# Altium PCB RemoteUnitBoard.PcbDoc
Units mm, origin at the board's own origin, x right, y up, seen from the top; angles counter-clockwise.
Board outline 60 x 32 mm, 4 copper layers (Top Copper, Signal Layer 1, Signal Layer 2, Bottom Copper), stack 1.57 mm thick; 58 components, 48 nets, 234 pads, 59 vias.
Unrouted connection lines stored in the file: 10.
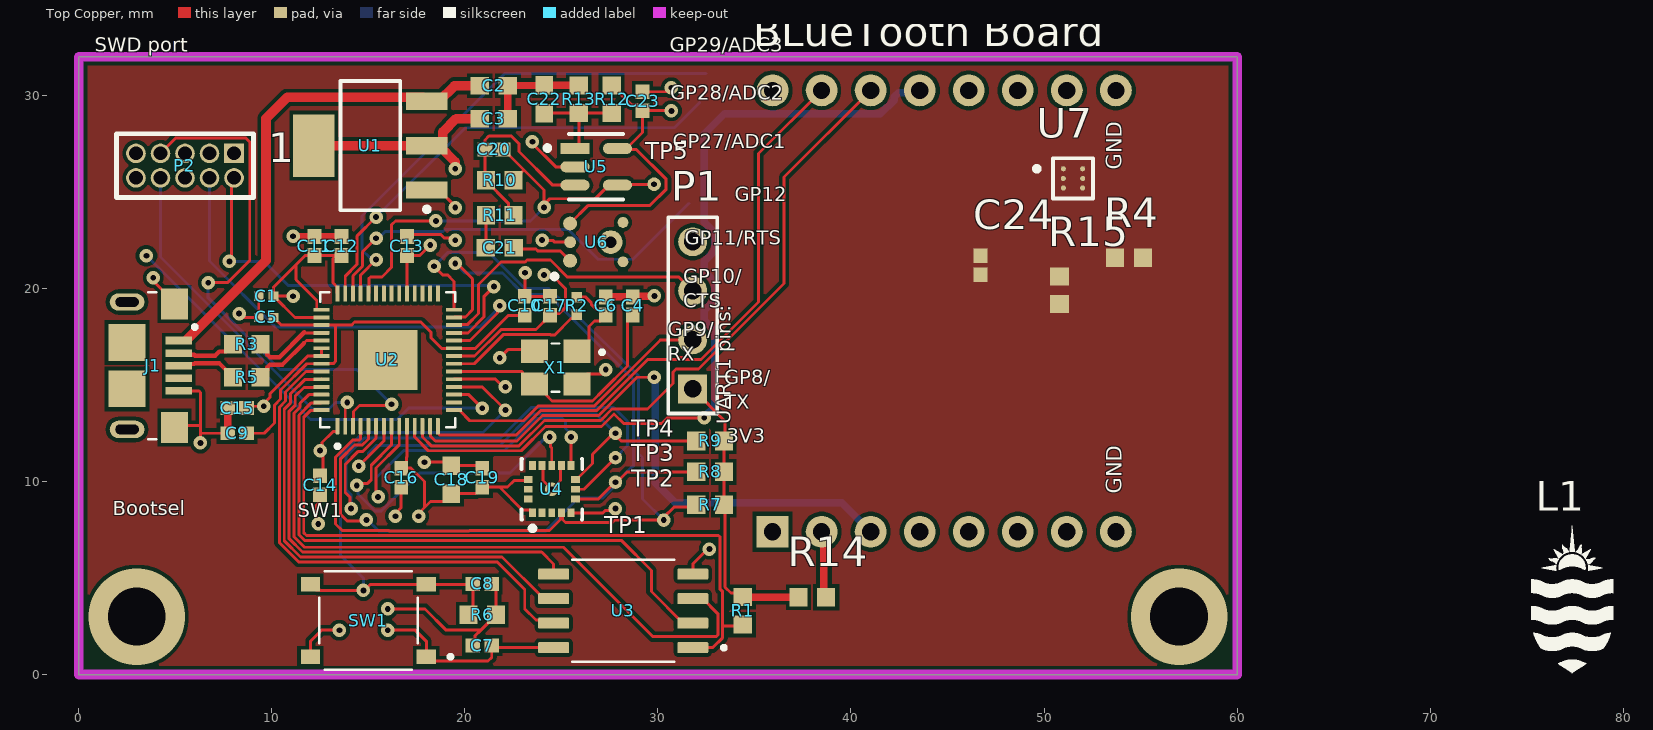
[diagram p0: Top Copper view]
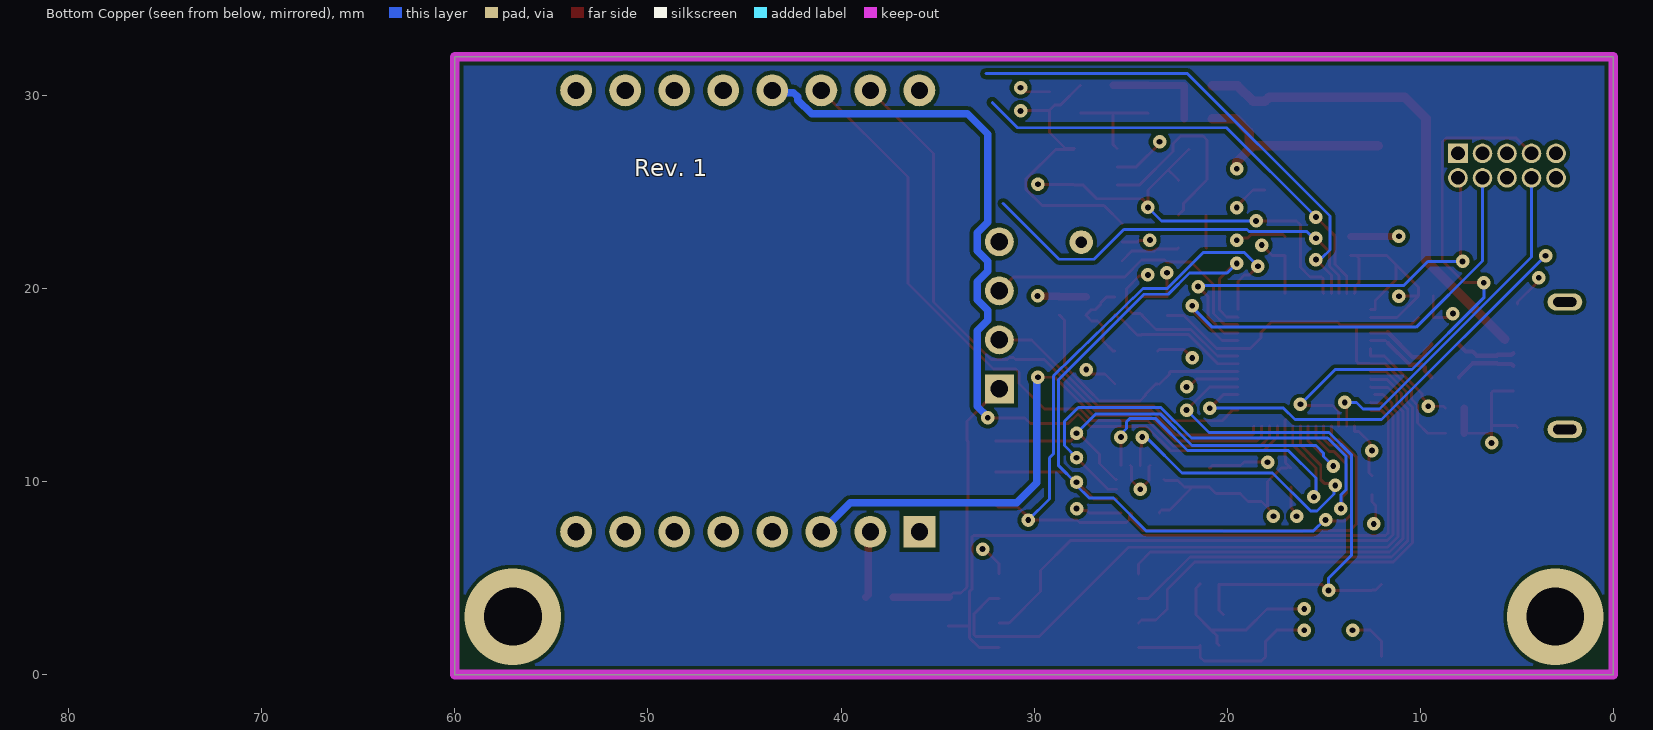
[diagram p1: Bottom Copper view, seen from below]
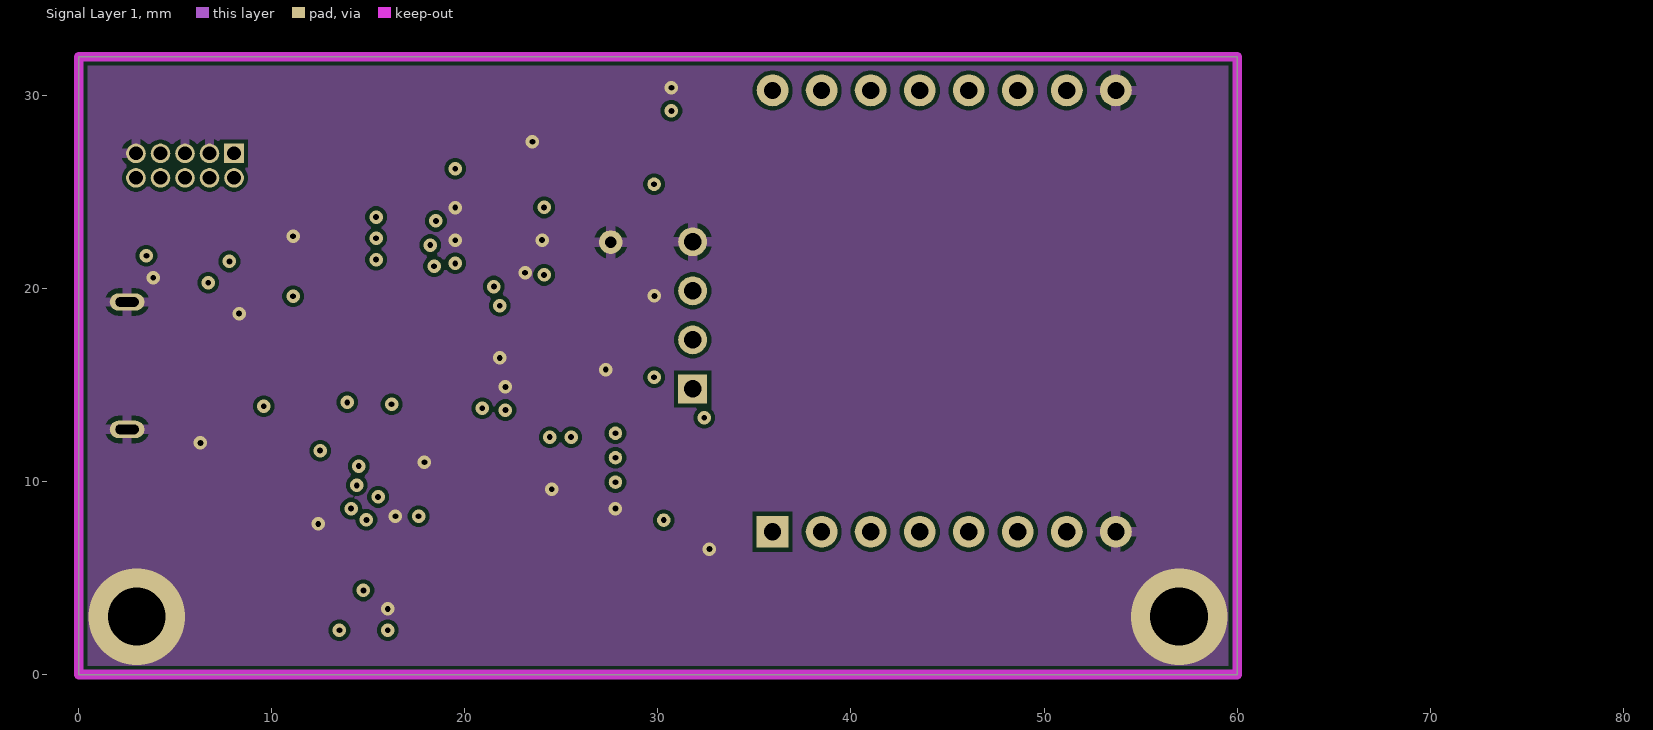
[diagram p2: Signal Layer 1]
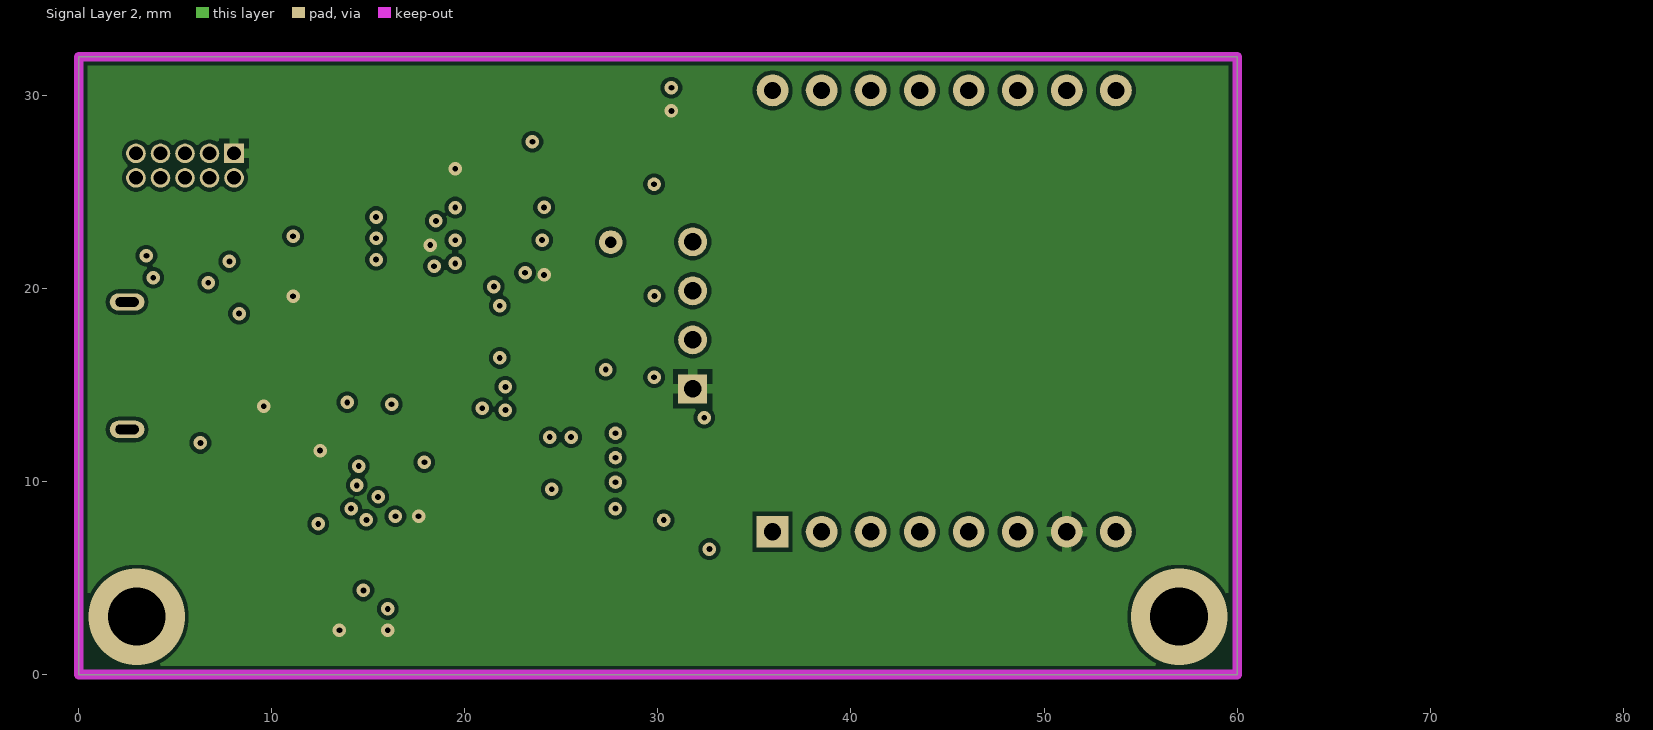
[diagram p3: Signal Layer 2]

## Layer stack, top to bottom
Top Mask: solder mask 0.015, Solder Resist, Dk 3.8
Top Copper: signal copper 0.035
Dielectric 1: prepreg 0.2, 7628, Dk 4.6
Signal Layer 1: signal copper 0.0175
Core: core 1.065, FR-4, Dk 4.5
Signal Layer 2: signal copper 0.0175
Dielectric 2: prepreg 0.2, 7628, Dk 4.6
Bottom Copper: signal copper 0.035
Bottom Mask: solder mask 0.015, Solder Resist, Dk 3.8

## Board outline
0,0 60,0 60,32 0,32

## Design rules (kind name [scope] priority, off if disabled: settings)
BoardOutlineClearance [All] p1: gap=0.2 ignorepadtopadclearanceinfootprint=FALSE except(0.4: Arc-SplitBarrior Arc-SplitContinuation Track-SplitBarrior Track-SplitContinuation SMDPad-SplitBarrior SMDPad-SplitContinuation THPad-SplitBarrior THPad-SplitContinuation Via-SplitBarrior Via-SplitContinuation Fill-SplitBarrior Fill-SplitContinuation Poly-SplitBarrior Poly-SplitContinuation Region-SplitBarrior Region-SplitContinuation Text-SplitBarrior Text-SplitContinuation)
Clearance "Clearance Bottom Layer" [OnLayer('Bottom Layer')] p1: gap=0.203 ignorepadtopadclearanceinfootprint=TRUE except(0.254: Arc-Text Track-Text SMDPad-Text THPad-Text Via-Text Fill-Text Poly-Text Region-Text Text-Text)
Clearance "Clearance Top Layer" [OnLayer('Top Layer')] p2: gap=0.203 ignorepadtopadclearanceinfootprint=TRUE except(0.254: Arc-Text Track-Text SMDPad-Text THPad-Text Via-Text Fill-Text Poly-Text Region-Text Text-Text)
Clearance [All] p3: gap=0.2 ignorepadtopadclearanceinfootprint=FALSE except(0.1: Arc-Arc Arc-Track Track-Track SMDPad-SMDPad; 0.127: Arc-Via Track-Via SMDPad-Via THPad-Via Via-Via; 0.254: Arc-Text Track-Text SMDPad-Text THPad-Text Via-Text Fill-Text Poly-Text Region-Text Text-Text)
DiffPairsRouting [All] p1: maxlimit=0.254 minlimit=0.127 mostfreqgap=0.152 toplayer_minwidth=0.152 toplayer_maxwidth=0.5 toplayer_prefwidth=0.229 midlayer1_minwidth=0.152 midlayer1_maxwidth=0.5 midlayer1_prefwidth=0.229 midlayer2_minwidth=0.152 midlayer2_maxwidth=0.5 midlayer2_prefwidth=0.229 bottomlayer_minwidth=0.152 bottomlayer_maxwidth=0.5 bottomlayer_prefwidth=0.229 maxuncoupledlength=12.7
HoleSize [All] p1: absolutevalues=TRUE maxlimit=6.3 minlimit=0.2 maxpercent=80.000 minpercent=20.000
MinimumAnnularRing [All] p1: minimumring=0.076
MinimumSolderMaskSliver [All] p1: minsoldermaskwidth=0.1
PolygonConnect PolygonConnect_1 [All] p1: thpad.connectstyle=Relief thpad.reliefconductorwidth=0.508 thpad.reliefentries=4 thpad.polygonreliefangle="90 Angle" thpad.airgapwidth=0.254 smdpad.connectstyle=Relief smdpad.reliefconductorwidth=0.508 smdpad.reliefentries=4 smdpad.polygonreliefangle="90 Angle" smdpad.airgapwidth=0.254 via.connectstyle=Direct via.reliefconductorwidth=0.508 via.reliefentries=4 via.polygonreliefangle="90 Angle" via.airgapwidth=0.254
RoutingCorners [All] p1: cornerstyle=Round minsetback=2.54 maxsetback=2.54
RoutingVias [All] p1: holewidth=0.5 width=1 viastyle="Through Hole" minholewidth=0.2 minwidth=0.45 maxholewidth=1 maxwidth=2
SilkToSilkClearance [All] p1: silktosilkclearance=0.1
SilkToSolderMaskClearance [IsPad] p1: minsilkscreentomaskgap=0.1 clearancetoexposedcopper=TRUE
SolderMaskExpansion [All] p1: expansion=0.102 istentingtop=FALSE
SupplyNets "Schematic Supply Nets" [InNet('VCC')] p1: voltage=0.000
SupplyNets "Schematic Supply Nets_4" [InNet('5V')] p2: voltage=0.000
SupplyNets "Schematic Supply Nets_3" [InNet('GND')] p3: voltage=0.000
SupplyNets "Schematic Supply Nets_2" [InNet('3V3')] p4: voltage=0.000
SupplyNets "Schematic Supply Nets_1" [InNet('1V1')] p5: voltage=0.000
Width [All] p1: maxlimit=2.54 minlimit=0.089 preferedwidth=0.381
24 further rules are at their usual default settings.

## Classes and differential pairs
component class RemoteSensors: C18 C19 C20 C21 C22 C23 C24 R4 R7 R8 R9 R10 R11 R12 R13 R15 U4 U5 U6 U7
component class RemoteMain: "BLueTooth Board" C1 C2 C3 C4 C5 C6 C7 C8 C9 C10 C11 C12 C13 C14 C15 C16 C17 J1 L1 P1 P2 R1 R2 R3 R5 R6 R14 SW1 TP1 TP2 TP3 TP4 TP5 U1 U2 U3 X1
differential pair USB_DX: +USB_DX_P -USB_DX_N
differential pair USB_D: +USB_D_P -USB_D_N

## Components (designator, comment, footprint, x,y, rotation, side; value= is the part's Value field where it differs from the comment)
"BLueTooth Board" "RN4871 CLICK" "mikroBUS - Large" 57.53,6.13 r90 top
C1 "CL05A105KA5NQNC" FP-CL542-IPC_C 9.7,19.6 r0 top
C2 "CL10A106KP8NNNC" FP-CL10-IPC_B 21.5,30.5 r0 top
C3 "CL10A106KP8NNNC" FP-CL10-IPC_B 21.5,28.8 r0 top
C4 "0402CG330J500NT" FP-0402-L_1_0_1-W_0_5_0_1-IPC_A 28.7,19.1 r270 top
C5 "CL05A105KA5NQNC" FP-CL542-IPC_C 9.7,18.5 r180 top
C6 "0402CG330J500NT" FP-0402-L_1_0_1-W_0_5_0_1-IPC_A 27.3,19.1 r270 top
C7 "CL05B104KO5NNNC" CAPC1050X55X23ML05T13 20.9,1.5 r0 top
C8 "CL05B104KO5NNNC" CAPC1050X55X23ML05T13 20.9,4.7 r180 top
C9 "CL05B104KO5NNNC" CAPC1050X55X23ML05T13 8.2,12.5 r0 top
C10 "CL05B104KO5NNNC" CAPC1050X55X23ML05T13 23.1,19.1 r270 top
C11 "CL05B104KO5NNNC" CAPC1050X55X23ML05T13 12.2,22.2 r270 top
C12 "CL05B104KO5NNNC" CAPC1050X55X23ML05T13 13.6,22.2 r270 top
C13 "CL05B104KO5NNNC" CAPC1050X55X23ML05T13 17,22.2 r270 top
C14 "CL05B104KO5NNNC" CAPC1050X55X23ML05T13 12.5,9.81 r90 top
C15 "CL05B104KO5NNNC" CAPC1050X55X23ML05T13 8.2,13.8 r0 top
C16 "CL05B104KO5NNNC" CAPC1050X55X23ML05T13 16.7,10.2 r90 top
C17 "CL05B104KO5NNNC" CAPC1050X55X23ML05T13 24.4,19.1 r270 top
C18 "CL10A106KP8NNNC" FP-CL10-IPC_B 19.3,10.1 r90 top
C19 "CL05B104KO5NNNC" CAPC1050X55X23ML05T13 20.9,10.2 r270 top
C20 "0402CG330J500NT" FP-0402-L_1_0_1-W_0_5_0_1-IPC_A 21.5,27.2 r0 top
C21 "CL10A106KP8NNNC" FP-CL10-IPC_B 21.8,22.1 r180 top
C22 "CL10A225KO8NNNC" FP-CL10-IPC_B 24.1,29.8 r90 top
C23 "CL05B104KO5NNNC" CAPC1050X55X23ML05T13 29.2,29.7 r270 top
C24 "CL05B104KO5NNNC" CAPC1050X55X23ML05T13 46.7,21.2 r90 top
J1 "10118193-0001LF" FCI_10118193-0001LF 2.5,16 r90 top
L1 "JCU-LOGO" "JCU Logo Without Text" 77.4,3.8 r0 top
P1 "Header 4" HDR1X4 31.8,14.8 r90 top
P2 "Header 1.27mm 2x5 PTH" "Header 1.27mm 2x5 PTH" 8.04,27 r180 top
R1 "0603WAF1002T5E" FP-CRCW0603-e3-IPC_B 34.4,3.3 r90 top
R2 "0402WGF1001TCE" RESC1005X40X25NL05T05 25.8,19.1 r270 top
R3 "0603WAF270JT5E" FP-CRCW0603-e3-IPC_B 8.7,17.1 r180 top
R4 "0603WAF4701T5E" FP-CRCW0603-e3-IPC_B 54.4,21.6 r0 top
R5 "0603WAF270JT5E" FP-CRCW0603-e3-IPC_B 8.7,15.4 r180 top
R6 "0603WAF1003T5E" FP-CRCW0603-e3-IPC_B 20.9,3.1 r0 top
R7 "0603WAF4701T5E" FP-CRCW0603-e3-IPC_B 32.7,8.8 r0 top
R8 "0603WAF4701T5E" FP-CRCW0603-e3-IPC_B 32.7,10.5 r0 top
R9 "0603WAF4701T5E" FP-CRCW0603-e3-IPC_B 32.7,12.1 r0 top
R10 "0603WAF2203T5E" FP-CRCW0603-e3-IPC_B 21.8,25.6 r0 top
R11 "0603WAF3301T5E" FP-CRCW0603-e3-IPC_B 21.8,23.8 r0 top
R12 "0603WAF1003T5E" FP-CRCW0603-e3-IPC_B 27.6,29.8 r90 top
R13 "0603WAF1003T5E" FP-CRCW0603-e3-IPC_B 25.9,29.8 r270 top
R14 "0603WAF1002T5E" FP-CRCW0603-e3-IPC_B 38,4 r180 top
R15 "0603WAF4701T5E" FP-CRCW0603-e3-IPC_B 50.8,19.9 r90 top
SW1 "TS-1187A-B-A-B" SW_TS-1187A-B-A-B 15,2.8 r180 top
TP1 "Test point" "Test point-Footprint-1" 30.3,8 r90 top
TP2 "Test point" "Test point-Footprint-1" 27.8,9.967 r90 top
TP3 "Test point" "Test point-Footprint-1" 27.8,11.233 r90 top
TP4 "Test point" "Test point-Footprint-1" 27.8,12.5 r90 top
TP5 "Test point" "Test point-Footprint-1" 29.8,25.4 r90 top
U1 "AMS1117-3.3" SOT230P700X180-4N 15.1,27.4 r0 top
U2 "RP2040" QFN40P700X700X90-57N 16,16.3 r0 top
U3 "W25Q128JVSIQ" SOIC127P790X216-8N 28.2,3.3 r90 top
U4 "LIS3DHTR" FP-LGA-16-7983231-MFG 24.5,9.6 r90 top
U5 "LMV321IDBVR" FP-DBV0005A-IPC_B 26.8,26.3 r180 top
U6 "Goertek S08OB381-026" Goertek_S08OB381-026 26.8,22.4 r90 top
U7 "HDC2010YPAR" FP-YPA0006-MFG 51.5,25.7 r0 top
X1 "X322512MSB4SI" X322512MSB4SI-Footprint-1 24.7,15.9 r180 top

## Footprints (in the part's own frame and the unit in brackets; to place one, negate y for a bottom-side part, rotate by r counter-clockwise, add the part's x,y. Pads: shape width x height; smd on the part's side, far side on the other; paste and mask are expansions set on the pad)
CAPC1050X55X23ML05T13 [mm] "Chip Capacitor, 2-Leads, Body 1.05x0.55mm, IPC Low Density"
  rect 0.76x0.72 smd: 1(-0.49,0) 2(0.49,0)
  body extent -0.53,-0.28 0.53,0.27, height 0.55
FCI_10118193-0001LF [mm]
  rect 0.4x1.35 smd: 1(1.3,-2.675) 2(0.65,-2.675) 3(0,-2.675) 4(-0.65,-2.675) 5(-1.3,-2.675)
  rect 1.6x1.4 smd: S1(3.2,-2.45) S2(-3.2,-2.45)
  rect 1.9x1.9 smd: S3(-1.2,0) S4(1.2,0)
  oval 0.9x1.8 hole 0.5 slot 1.2 at 90 deg: S5(3.3,0) S6(-3.3,0)
  silkscreen extent -3.8,-3.6 3.8,-1.1, body extent -3.93,-2.92 3.93,2.74, height 3.18
FP-0402-L_1_0_1-W_0_5_0_1-IPC_A [mm]
  rect 0.781x0.712 smd: 1(-0.466,0) 2(0.466,0)
  body extent -1.06,-0.56 1.06,0.56, height 0.25
FP-CL10-IPC_B [mm]
  rect 0.958x0.912 smd paste+0 mask+0: 1(-0.727,0) 2(0.727,0)
  body extent -1.46,-0.71 1.46,0.71, height 0.25
FP-CL542-IPC_C [mm]
  rect 0.515x0.472 smd paste+0 mask+0: 1(-0.379,0) 2(0.379,0)
  body extent -0.74,-0.38 0.74,0.38, height 0.25
FP-CRCW0603-e3-IPC_B [mm]
  rect 0.935x0.962 smd paste+0 mask+0: 1(-0.715,0) 2(0.715,0)
  body extent -1.43,-0.73 1.43,0.73, height 0.25
FP-DBV0005A-IPC_B [mm]
  rect 1.505x0.572 smd paste+0 mask+0: 1(1.1,-0.95)
  rrect100% 1.505x0.572 smd paste+0 mask+0: 2(1.1,0) 3(1.1,0.95) 4(-1.1,0.95) 5(-1.1,-0.95)
  silkscreen extent -1.4,-1.7 2.65,1.7, body extent -2.1,-1.7 2.1,1.7, height 0.25
FP-LGA-16-7983231-MFG [mm]
  rect 0.45x0.35 smd paste-1000 mask+0: 1(-1.225,1) 2(-1.225,0.5) 3(-1.225,0) 4(-1.225,-0.5) 5(-1.225,-1) 9(1.225,-1) 10(1.225,-0.5) 11(1.225,0) 12(1.225,0.5) 13(1.225,1)
  rect 0.35x0.45 smd paste-1000 mask+0: 6(-0.5,-1.225) 7(0,-1.225) 8(0.5,-1.225) 14(0.5,1.225) 15(0,1.225) 16(-0.5,1.225)
  silkscreen extent -2.15,-1.57 1.57,1.58, body extent -2.07,-2.07 2.07,2.07, height 0.25
FP-YPA0006-MFG [mm]
  round 0.263 smd paste-1000 mask-1000: A1(-0.5,0.5) A2(0.5,0.5) B1(-0.5,0) B2(0.5,0) C1(-0.5,-0.5) C2(0.5,-0.5)
  silkscreen extent -2,-1.04 1.04,1.04, body extent -1.24,-1.24 1.24,1.24, height 0.25
Goertek_S08OB381-026 [mm] "Goertek S08OB381-026 SMD package"
  round 0.72 smd: 1(-0.965,1.35) 4(0.965,1.35)
  round 0.56 smd: 2(-1.02,-1.39) 3(1.02,-1.39)
  round 0.61 smd: 5(0,1.35)
  round 1.22 hole 0.61: 6(0,-0.75)
  silkscreen extent -1.9,2.03 -1.65,2.28, body extent -1.5,-1.88 1.5,1.88, height 1.1
HDR1X4 [mm] "Connector; Header; 4 Position"
  rect 1.5x1.5 hole 0.9: 1(0,0)
  round 1.5 hole 0.9: 2(2.54,0) 3(5.08,0) 4(7.62,0)
  silkscreen extent -1.27,-1.27 8.89,1.27
"Header 1.27mm 2x5 PTH" [mil] "Header 1.27mm pitch, 2x5, PTH through hole"
  rect 40x40 hole 28: 1(0,0)
  round 40 hole 28: 2(0,50) 3(50,0) 4(50,50) 5(100,0) 6(100,50) 7(150,0) 8(150,50) 9(200,0) 10(200,50)
  silkscreen extent -40,-40 240,90
"JCU Logo Without Text" [mm]
  silkscreen extent -2.17,-3.7 2.08,3.91
"mikroBUS - Large" [mil]
  rect 65x65 hole 35: 1(50,850)
  round 65 hole 35: 2(50,750) 3(50,650) 4(50,550) 5(50,450) 6(50,350) 7(50,250) 8(50,150) 9(950,150) 10(950,250) 11(950,350) 12(950,450) 13(950,550) 14(950,650) 15(950,750) 16(950,850)
  body extent -5,100 1010,900, height 82
QFN40P700X700X90-57N [mm]
  rrect25% 0.2x0.84 smd: 1(-2.6,-3.435) 2(-2.2,-3.435) 3(-1.8,-3.435) 4(-1.4,-3.435) 5(-1,-3.435) 6(-0.6,-3.435) 7(-0.2,-3.435) 8(0.2,-3.435) 9(0.6,-3.435) 10(1,-3.435) 11(1.4,-3.435) 12(1.8,-3.435) 13(2.2,-3.435) 14(2.6,-3.435) 29(2.6,3.435) 30(2.2,3.435) 31(1.8,3.435) 32(1.4,3.435) 33(1,3.435) 34(0.6,3.435) 35(0.2,3.435) 36(-0.2,3.435) 37(-0.6,3.435) 38(-1,3.435) 39(-1.4,3.435) 40(-1.8,3.435) 41(-2.2,3.435) 42(-2.6,3.435)
  rrect25% 0.84x0.2 smd: 15(3.435,-2.6) 16(3.435,-2.2) 17(3.435,-1.8) 18(3.435,-1.4) 19(3.435,-1) 20(3.435,-0.6) 21(3.435,-0.2) 22(3.435,0.2) 23(3.435,0.6) 24(3.435,1) 25(3.435,1.4) 26(3.435,1.8) 27(3.435,2.2) 28(3.435,2.6) 43(-3.435,2.6) 44(-3.435,2.2) 45(-3.435,1.8) 46(-3.435,1.4) 47(-3.435,1) 48(-3.435,0.6) 49(-3.435,0.2) 50(-3.435,-0.2) 51(-3.435,-0.6) 52(-3.435,-1) 53(-3.435,-1.4) 54(-3.435,-1.8) 55(-3.435,-2.2) 56(-3.435,-2.6)
  rect 3.1x3.1 smd paste-0.57: 57(0,0)
  silkscreen extent -3.5,-4.57 3.5,3.5, body extent -3.5,-3.5 3.5,3.5, height 0.9
RESC1005X40X25NL05T05 [mm] "Chip Resistor, 2-Leads, Body 1.05x0.55mm, IPC Medium Density"
  rect 0.55x0.55 smd: 1(-0.45,0) 2(0.45,0)
  body extent -0.53,-0.28 0.53,0.28, height 0.4
SOIC127P790X216-8N [mm]
  rrect25% 0.58x1.61 smd: 1(-1.905,-3.605) 2(-0.635,-3.605) 3(0.635,-3.605) 4(1.905,-3.605) 5(1.905,3.605) 6(0.635,3.605) 7(-0.635,3.605) 8(-1.905,3.605)
  silkscreen extent -2.64,-5.32 2.64,2.64, body extent -2.69,-4.05 2.69,4.05, height 2.16
SOT230P700X180-4N [mm] "SOT223, 4-Leads, Body 6.51x7.00mm (avg), Pitch 2.30mm, IPC Medium Density"
  rect 2.15x0.9 smd: 1(2.93,-2.3) 2(2.93,0) 3(2.93,2.3)
  rect 2.15x3.25 smd: 4(-2.93,0)
  silkscreen extent -1.55,-3.42 3.06,3.35, body extent -1.86,-3.35 1.86,3.35, height 1.8
SW_TS-1187A-B-A-B [mm]
  rect 1x0.75 smd: A(-3,1.875) B(3,1.875) C(-3,-1.875) D(3,-1.875)
  silkscreen extent -4.35,-2.55 2.55,2.55, body extent -3.25,-2.55 3.25,2.55, height 1.55
"Test point-Footprint-1" [mm]
  round 0.7 hole 0.3: 1(0,0)
X322512MSB4SI-Footprint-1 [mm]
  rect 1.4x1.2 smd: 1(-1.1,-0.85) 2(1.1,-0.85) 3(1.1,0.85) 4(-1.1,0.85)
  silkscreen extent -2.5,-1.25 0.2,1.25, body extent -1.6,-1.25 1.6,1.25, height 0.6

## Part data
"BLueTooth Board": library part CMP-011-00000-2, "mikroBUS compatible add-on board", Design Item ID="mikroBUS compatible add-on board", Source=mikroBUS_Add-on_standard.SchLib
C1 C5: library part CMP-00005-3, "Cap Ceramic 1uF 25V X5R ±10% SMD 0402 +85°C Paper T/R", Capacitance=1uF, Case Code (Imperial)=0402, Case Code (Metric)=1005, Dielectric=X5R, JLCPCB Part=C52923, Max Operating Temperature=85°C, Min Operating Temperature=-55°C, Package Quantity=10000, Tolerance=10%, Voltage Rating=25V, Case/Package=0402, Depth=0.5mm, Height=0.5mm, Lead Free="Lead Free", Length=1mm, Material=Ceramic, Mount="Surface Mount", Packaging="Tape and Reel", Radiation Hardening=No, Thickness=0.022inch, Width=0.02inch
C2 C3 C18 C21: library part CMP-00006-4, "Cap Ceramic 10uF 10V X5R ±10% Pad SMD 0603 +85°C T/R", Capacitance=10uF, Case Code (Imperial)=0603, Case Code (Metric)=1608, JLCPCB Part=C19702, Max Operating Temperature=85°C, Min Operating Temperature=-55°C, Tolerance=10%, Voltage Rating=10V, Case/Package=0603, Length=0.063inch, Mount="Surface Mount", Packaging="Tape and Reel", Thickness=0.041inch, Width=0.031inch
C4 C6 C20: library part CMP-00008-5, "General Purpose Ceramic Capacitor, 0402, 33pF, 5%, C0G, 30ppm/°C, 50V", Capacitance=33pF, Case Code (Imperial)=0402, Case Code (Metric)=1005, Dielectric=C0G, Insulation Resistance=100GR, JLCPCB Part=C1562, Max Operating Temperature=125°C, Min Operating Temperature=-55°C, Package Quantity=1, Temperature Coefficient=30ppm/°C, Tolerance=5%, Voltage=50V, Case/Package=0402, Construction=Flat, Contact Plating=Tin, Depth=0.5mm, Height=0.5mm, Lead Free="Lead Free", Length=1mm, Mount="Surface Mount", Number of Pins=2, Packaging="Tape and Reel", Radiation Hardening=No, REACH SVHC="No SVHC", RoHS Compliant=Yes, Series=-, Termination=SMD/SMT, Thickness=0.022inch, Voltage Rating=50V, Voltage Rating (DC)=50V, Width=0.5mm
C7 C8 C9 C10 C11 C12 C13 C14 C15 C16 C17 C19 C23 C24: library part CMP-00007-3, "Chip Capacitor, 100 nF, +/- 10%, 16 V, -55 to 125 degC, 0402 (1005 Metric), RoHS, Tape and Reel", Capacitance=100nF, Case Size/Dimension=0402, Dielectric=X7R, JLCPCB Part=C1525, Manufacturer="Samsung Electro-Mechanics", Rated Voltage=16V, Tolerance (%)=±10%, Datasheet URL=https://datasheet.ciiva.com/29198/458718-da-01-en-vs-kondensator-0402-29198423.pdf, Datasheet Version=Nov-10, Manufacturer URL=http://www.samsungsem.com/global/index.jsp
C22: library part CMP-006-0001-1, "Cap Ceramic 2.2uF 16V X5R ±20% Pad SMD 0603 +85°C T/R", Capacitance=2.2uF, Case Code (Imperial)=0603, Case Code (Metric)=1608, JLCPCB Part=C23630, Max Operating Temperature=85°C, Min Operating Temperature=-55°C, Tolerance=10%, Voltage Rating=16V, Case/Package=0603, Length=1.6mm, Mount="Surface Mount", Packaging="Tape and Reel", Thickness=0.035inch, Width=0.031inch
J1: library part CMP-045-000000-7, "USB - micro B USB 2.0 Receptacle Connector 5 Position Surface Mount, Right Angle; Through Hole", JLCPCB Part=C132562, Package=None, Component Type=Standard, Design Item ID=10118193-0001LF, MF="Amphenol ICC", MP=10118193-0001LF, Pin Count=11, SnapEDA_Link=https://www.snapeda.com/parts/10118193-0001LF/Amphenol%20FCI/view-part/2758989/?ref=snap, Source=SnapEDAsch.SchLib
L1: library part CMP-026-0017-5, "James Cook University Logo", Component Type=Standard, Design Item ID=JCU-LOGO, Pin Count=0, Source=JCULibrary.SchLib
P1: library part CMP-002-00124-1, "Header, 4-Pin", Component Type=Standard, Design Item ID="Header 4", LatestRevisionDate=17-Jul-2002, LatestRevisionNote="Re-released for DXP Platform.", Pin Count=4, Publisher="Altium Limited", Source="Miscellaneous Connectors.SchLib"
P2: library part CMP-005-0002-2, "Header 1.27mm pitch, 2x5, PTH through hole", Component Type=Standard, Design Item ID="Header 1.27mm 2x5 PTH", element14 Item=1577743, Pins=10, Source=JCULibrary.SchLib
R1 R14: library part CMP-009-0009-1, "RES Thick Film, 10kΩ, 1%, 0.1W, 100ppm/°C, 0603", Case Code (Imperial)=0603, Case Code (Metric)=1608, JLCPCB Part=C25804, Max Operating Temperature=155°C, Min Operating Temperature=-55°C, Package Quantity=5000, Power Rating=100mW, Resistance=10k, Temperature Coefficient=100ppm/°C, Tolerance=1%, Voltage Rating=75V, Case/Package=0603, Composition="Thick Film", Contact Plating=Tin, Depth=0.85mm, Height=0.45mm, Lead Free="Lead Free", Length=1.55mm, Military Standard=Not, Mount="Surface Mount", Number of Pins=2, Packaging="Tape and Reel", Radiation Hardening=No, Termination=SMD/SMT, Voltage Rating (DC)=75V, Weight=7.1E-05oz, Width=0.85mm
R2: library part CMP-009-0000-2, "Chip Resistor, 1 KOhm, +/- 1%, 100 mW, -55 to 155 degC, 0402 (1005 Metric), RoHS, Tape and Reel", Case Code (Imperial)=0402, Case Code (Metric)=1005, JLCPCB Part=C11702, Manufacturer="Basic Passives", Max Operating Temperature="155 degC", Min Operating Temperature="-55 degC", Package Quantity=10000, Power Rating="100 mW", Resistance="1 KOhm", Tolerance=1%, Voltage Rating="50 V", Case\/Package=0402, Height="0.35 mm", Length="1 mm", Mount="Surface Mount", Mounting Technology="Surface Mount", PackageDescription="2-Pin Surface Mount Device, Body 1 x 0.5 mm", PackageReference=0402, Packaging="Tape and Reel", PartNumber=0402WGF1001TCE, Pins=2, Radiation Hardening=No, REACH SVHC=Yes, RoHSCompliant=true, Width="0.5 mm"
R3 R5: library part CMP-00004-5, "RES Thick Film, 27Ω, 1%, 0.1W, 200ppm/°C, 0603", Case Code (Imperial)=0603, Case Code (Metric)=1608, JLCPCB Part=C25190, Max Operating Temperature=155°C, Min Operating Temperature=-55°C, Package Quantity=5000, Power Rating=100mW, Resistance=27R, Temperature Coefficient=100ppm/°C, Tolerance=1%, Voltage Rating=75V, Case/Package=0603, Composition="Thick Film", Contact Plating=Tin, Depth=0.85mm, Height=0.45mm, Lead Free="Lead Free", Length=1.55mm, Military Standard=Not, Mount="Surface Mount", Number of Pins=2, Packaging="Tape and Reel", Radiation Hardening=No, Termination=SMD/SMT, Voltage Rating (DC)=75V, Weight=7.1E-05oz, Width=0.85mm
R4 R7 R8 R9 R15: library part CMP-009-0001-3, "RES Thick Film, 4.7kΩ, 1%, 0.1W, 100ppm/°C, 0603", Case Code (Imperial)=0603, Case Code (Metric)=1608, JLCPCB Part=C23162, Max Operating Temperature=155°C, Min Operating Temperature=-55°C, Package Quantity=5000, Power Rating=100mW, Resistance=4.7k, Temperature Coefficient=100ppm/°C, Tolerance=1%, Voltage Rating=75V, Case/Package=0603, Composition="Thick Film", Contact Plating=Tin, Depth=0.85mm, Height=0.45mm, Lead Free="Lead Free", Length=1.55mm, Military Standard=Not, Mount="Surface Mount", Number of Pins=2, Packaging="Tape and Reel", Radiation Hardening=No, Termination=SMD/SMT, Voltage Rating (DC)=75V, Weight=7.1E-05oz, Width=0.85mm
R6 R12 R13: library part CMP-009-0004-3, "RES Thick Film, 100kΩ, 1%, 0.1W, 100ppm/°C, 0603", Case Code (Imperial)=0603, Case Code (Metric)=1608, JLCPCB Part=C25803, Max Operating Temperature=155°C, Min Operating Temperature=-55°C, Package Quantity=5000, Power Rating=100mW, Resistance=100k, Temperature Coefficient=100ppm/°C, Tolerance=1%, Voltage Rating=75V, Case/Package=0603, Composition="Thick Film", Contact Plating=Tin, Depth=0.85mm, Height=0.45mm, Lead Free="Lead Free", Length=1.55mm, Military Standard=Not, Mount="Surface Mount", Number of Pins=2, Packaging="Tape and Reel", Radiation Hardening=No, Termination=SMD/SMT, Voltage Rating (DC)=75V, Weight=7.1E-05oz, Width=0.85mm
R10: library part CMP-009-0005-2, "RES Thick Film, 220kΩ, 1%, 0.1W, 100ppm/°C, 0603", Case Code (Imperial)=0603, Case Code (Metric)=1608, JLCPCB Part=C22961, Max Operating Temperature=155°C, Min Operating Temperature=-55°C, Package Quantity=5000, Power Rating=100mW, Resistance=220k, Temperature Coefficient=100ppm/°C, Tolerance=1%, Voltage Rating=75V, Case/Package=0603, Composition="Thick Film", Contact Plating=Tin, Depth=0.85mm, Height=0.45mm, Lead Free="Lead Free", Length=1.55mm, Military Standard=Not, Mount="Surface Mount", Number of Pins=2, Packaging="Tape and Reel", Radiation Hardening=No, Termination=SMD/SMT, Voltage Rating (DC)=75V, Weight=7.1E-05oz, Width=0.85mm
R11: library part CMP-009-0006-1, "RES Thick Film, 3.3kΩ, 1%, 0.1W, 100ppm/°C, 0603", Case Code (Imperial)=0603, Case Code (Metric)=1608, JLCPCB Part=C22978, Max Operating Temperature=155°C, Min Operating Temperature=-55°C, Package Quantity=5000, Power Rating=100mW, Resistance=3.3k, Temperature Coefficient=100ppm/°C, Tolerance=1%, Voltage Rating=75V, Case/Package=0603, Composition="Thick Film", Contact Plating=Tin, Depth=0.85mm, Height=0.45mm, Lead Free="Lead Free", Length=1.55mm, Military Standard=Not, Mount="Surface Mount", Number of Pins=2, Packaging="Tape and Reel", Radiation Hardening=No, Termination=SMD/SMT, Voltage Rating (DC)=75V, Weight=7.1E-05oz, Width=0.85mm
SW1: library part CMP-051-000000-5, "SPST 50mA @ 12VDC Top Actuated Round Button 160gf SMD Tactile Switches RoHS", JLCPCB Part=C318884, Package=None, Availability=Unavailable, Component Type=Standard, Design Item ID=TS-1187A-B-A-B, MP=TS-1187A-B-A-B, Pin Count=4, Price=None, Source=TS-1187A-B-A-B.SchLib
TP1 TP2 TP3 TP4 TP5: library part CMP-004-0001-1, "Test point for in-circuit debugging (0.3mm hole, 0.7mm diameter)"
U1: library part CMP-00001-4, "3.3V 1A LOW DROPOUT VOLTAGE REGULATOR SOT-223", Dropout voltage="1.3 V", JLCPCB Part=C6186, Output current="1 A", Output voltage="3.3 V"
U2: library part CMP-043-000000-5, "ARM Cortex-M0+ MCU 32-Bit Microcontroller for Raspberry Pi Pico", JLCPCB Part=C2040, Package=None, Availability=Available, Component Type=Standard, Design Item ID=RP2040, MP=RP2040, Pin Count=57, Price=None, Source=RP2040.SchLib
U3: library part CMP-031-00006-4, "FLASH - NOR Memory IC 128Mb (16M x 8) SPI - Quad I/O, QPI, DTR 133 MHz 8-SOIC", JLCPCB Part=C97521, Package="SOIC-8 Winbond", Availability="In Stock", Check_prices=https://www.snapeda.com/parts/W25Q128JVSIQ/Winbond+Electronics/view-part/?ref=eda, Component Type=Standard, Design Item ID=W25Q128JVSIQ, MF="Winbond Electronics", MP=W25Q128JVSIQ, Pin Count=8, Price=None, Purchase-URL=https://pricing.snapeda.com/search/part/W25Q128JVSIQ/?ref=eda, SnapEDA_Link=https://www.snapeda.com/parts/W25Q128JVSIQ/Winbond+Electronics/view-part/?ref=snap, Source=W25Q128JVSIQ.SchLib
U4: library part CMP-00010-2, "ACCEL 2-16G I2C/SPI 16LGA", Case/Package=LGA, JLCPCB Part=C15134, Max Operating Temperature=85°C, Max Supply Voltage=3.6V, Min Operating Temperature=-40°C, Min Supply Voltage=1.71V, Operating Supply Current=11uA, Operating Supply Voltage=2.5V, Package Quantity=1, Axis="X, Y, Z", Bandwidth=5kHz, Contact Plating=Gold, Depth=3mm, Height=1mm, Interface=I2C, Lead Free="Lead Free", Length=3mm, Max Supply Voltage (DC)=3.6V, Min Supply Voltage (DC)=1.71V, Number of Pins=16, Output Type=Digital, Packaging="Tape and Reel", Radiation Hardening=No, REACH SVHC="No SVHC", Resolution=16b, RoHS Compliant=Yes, Sensor Type="3 Axis", Series=-, Width=3mm
U5: library part CMP-00012-2, "General Purpose Amplifier 1 Circuit Rail-to-Rail SOT-23-5", Case/Package=SOT-23-5, Input Bias Current=250nA, Input Offset Voltage (Vos)=7mV, JLCPCB Part=C7972, Max Operating Temperature=125°C, Max Supply Voltage=5.5V, Min Operating Temperature=-40°C, Min Supply Voltage=2.7V, Nominal Supply Current=250uA, Operating Supply Current=130uA, Output current=160mA, Package Quantity=1, Power Supply Rejection Ratio (PSRR)=50dB, Voltage Gain=100dB, Amplifier Type="GENERAL PURPOSE", Bandwidth=1MHz, Common Mode Rejection Ratio=50dB, Contact Plating=Tin,Matte, Gain Bandwidth Product=1MHz, Lead Free="Lead Free", Mount="Surface Mount", Number of Amplifiers=1, Number of Channels=1, Number of Circuits=1, Number of Elements=1, Number of Pins=5, Output Current per Channel=160mA, Packaging="Tape and Reel", Radiation Hardening=No, REACH SVHC="No SVHC", RoHS Compliant=Yes, Series=-, Slew Rate=1V/µs, Supply Current=250uA, Technology=BICMOS, Unity Gain Bandwidth Product=1MHz
U6: library part CMP-00000-2, "MEMS Microphone SMD 3.76x3x1.1mm", JLCPCB Part=C2684423
U7: library part CMP-04948-000007-1, "GEN 2 HUMIDITY SENSOR", Manufacturer="Texas Instruments", Max Supply Voltage=3.6V, Min Supply Voltage=1.62V, Operating Supply Current=0.105-650uA, Package=YPA0006, Temperature="-40°C to +85°C", Temperature Range High=+85°C, Temperature Range Low=-40°C, Accuracy=2%, Automotive=No, Category=IC, ComponentLink2Description=Datasheet, ComponentLink2URL=http://www.ti.com/lit/ds/symlink/hdc2010.pdf, Device Class L1=Sensors, Device Class L2="Temperature and Humidity Sensors", Device Class L3=unset, Digikey Description="GEN 2 HUMIDITY SENSOR", Height=0.675mm, Interface=I2C, Ipc Land Pattern Name=BGA6N50P2X3_146X146X67, Lead Free=Yes, Manufacturer Part Number=HDC2010YPAR, Mouser Description="Low Power Humidity and Temperature Digital Sensor 6-DSBGA -40 to 85", Octopart=https://octopart.com/hdc2010ypar-texas+instruments-84791680, Resolution=14bits, RoHS=TRUE, Sensor Output=I2C, Standoff Height=0.215mm
X1: library part CMP-00002-4, "12MHz SMD Crystal Resonator 20pF ±10ppm ±30ppm -40℃~+85℃ SMD3225-4P  Crystals ROHS Yangxing Tech", Frequency="12 MHz", JLCPCB Part=C9002, Load capacitance="20 pF", Max ESR="80 Ω"

## Via types
v1: diameter 0.7, hole 0.3, Top Copper to Bottom Copper, 57 vias
v2: diameter 5, hole 3, Top Copper to Bottom Copper, 2 vias

## Nets (pads, with @x,y where several pads share a name; then routed paths per layer and width w, separated by ;. In a path a pad name is that pad's centre, name@x,y a point inside that pad or via, vN(x,y) a via of type N, cw(c..) or ccw(c..) an arc to the next point about the centre after c; other vN are vias at no path point)
1V1: C5.1 C9.2 C10.2 U2.23 U2.45 U2.50 | length 23.5
  Top Copper w0.152: C9.2 9.6,12.5 10.138,13.038 10.138,13.954 10.453,14.269 10.453,14.742 11.812,16.1 U2.50 12.589,16.124 13.211,16.124 13.3,16.213 13.3,18 13.224,18.076 ; C5.1 10.1,18.5 10.5,18.1 U2.45 12.885,18.1 13.224,18.1 14.125,18.1 14.282,18.256 17.718,18.256 18.252,17.722 18.252,17.434 18.786,16.9 U2.23 20.543,16.9 22.253,18.61 C10.2
3V3: C1.2 C3.1 C7.2 C11.2 C12.2 C13.2 C14.2 C15.2 C16.2 C17.2 C18.1 C19.2 C23.2 C24.2 P1.1 P2.1 R1.2 R4.2 R7.2 R8.2 R9.2 R12.2 R14.2 R15.2 SW1.A SW1.B U1.2 U1.4 U2.1 U2.10 U2.22 U2.33 U2.42 U2.43 U2.44 U2.48 U2.49 U3.8 U4.1 U4.14 U5.5 U6.4 U7.A1 | length 104.4
  Top Copper w0.152: C15.2 8.79,13.9 v1(9.585,13.9) 9.585,14.048 9.9,14.363 9.9,14.545 11.855,16.5 U2.49 U2.48 ; v1(11.1,19.6) C1.2@10.1,19.6 ; SW1.B 12,1.729 12.571,2.3 v1(13.5,2.3) ; C14.2 12.646,10.446 12.646,11.509 12.591,11.509 v1(12.5,11.6) 12.597,11.697 12.597,12.017 13.161,12.581 13.376,12.581 13.4,12.604 U2.1 ; U2.44 11.2,18.5 C1.2@10.1,19.6 ; U2.43 12.349,18.9 12.326,18.924 12.326,19.374 11.245,20.455 11.245,21.231 ; U2.1@13.4,13.185 U2.1@13.414,13.199 ; U2.42 13.376,19.759 13.376,20.079 13.161,20.294 13.161,21.559 C12.2@13.311,21.71 ; C12.2 C12.2@13.311,21.71 ; v1(16,2.3) 17.429,2.3 18,1.729 SW1.A 18.225,0.7 21.2,0.7 21.39,0.89 C7.2 21.495,1.395 U3.8 ; C16.2 C16.2@16.8,10.79 ; U2.10@16.976,13.209 17,13.185 17,11.283 16.984,11.267 16.984,10.974 C16.2@16.8,10.79 ; U2.33 C13.2 17.663,21.71 v1(18.2,22.247) ; v1(17.6,8.2) 17.6,8.348 17.9,8.648 17.9,8.652 ; U2.22 20.5,16.5 21.879,17.879 23.689,17.879 24.4,18.59 C17.2 24.489,18.699 24.899,18.699 25.2,19 25.2,20 24.557,20.643 24.157,20.643 v1(24.1,20.7) ; U4.14 23.226,10.051 22.551,10.051 22.21,9.71 21.79,9.71 ; U4.1 23.5,8.425 23.401,8.524 22.976,8.524 21.79,9.71 ; U6.4 26.392,24.307 29.593,24.307 30.426,25.141 30.426,25.659 28.882,27.204 27.947,27.204 U5.5 28.367,27.25 29.2,28.083 C23.2 ; R12.2 27.614,30.515 28.615,29.514 28.916,29.514 29.2,29.23 C23.2 ; v1(30.7,29.2) 30.69,29.21 C23.2 ; P1.1 33.475,13.125 R9.2@33.475,12.094 ; R9.2 R8.2 R7.2 33.475,8.74 33.475,4.525 33.78,4.22 34.195,4.22 R1.2 ; C1.2@10.1,19.6 C1.2 10.079,20.065 11.245,21.231 ; 11.245,21.231 11.724,21.71 C11.2 C12.2@13.311,21.71 ; C16.2@16.8,10.79 16.85,10.74 16.889,10.701 17.199,10.701 17.9,10 17.9,8.652 ; 17.9,8.652 18.218,8.97 18.92,8.97 19.3,9.35 C18.1 20.583,9.373 20.9,9.69 C19.2 21.79,9.71
  Top Copper w0.381: R1.2 34.408,4.008 37.277,4.008 R14.2
  Top Copper w0.5: U1.4 U1.2 U1.2@18.655,27.4 ; v1(19.5,26.2) 19.5,26.555 U1.2@18.655,27.4 ; C3.1 19.544,28.8 18.855,28.111 18.855,27.6 U1.2@18.655,27.4
5V: C2.1 J1.1 U1.3 | length 25.1
  Top Copper w0.5: J1.1@5.625,17.375 9.7,21.45 9.7,28.807 10.793,29.9 17.83,29.9 U1.3 18.655,29.7 19.455,30.5 C2.1
Accel_CS: R9.1 TP4.1 U2.7 U4.8 | length 25.2
  Top Copper w0.152: v1(14.5,10.8) 15.8,12.1 U2.7 ; U4.8 25.775,10.1 26.609,10.934 26.609,11.409 27.7,12.5 28.1,12.1 R9.1
  Bottom Copper w0.152: v1(14.5,10.8) 15,11.3 15,11.467 15.396,11.863 15.645,11.863 15.648,11.865 21.822,11.865 23.463,13.506 26.794,13.506 TP4.1
Accel_Int1: U2.8 U4.11 | length 18
  Top Copper w0.152: v1(14.4,9.8) 14.505,9.905 14.963,9.905 15.148,10.089 15.148,10.848 16.2,11.9 U2.8 ; v1(24.4,12.3) 24.424,12.276 24.424,11.806 24.5,11.73 U4.11
  Bottom Copper w0.152: v1(14.4,9.8) 14.466,9.734 14.466,9.352 15.346,8.472 15.672,8.472 17.647,10.447 22.331,10.447 24.079,12.195 24.295,12.195 v1(24.4,12.3)
Accel_Int2: U2.9 U4.9 | length 18.8
  Top Copper w0.152: v1(15.5,9.2) 15.4,9.3 15.4,10.7 16.6,11.9 U2.9 ; U4.9 v1(25.5,12.3)
  Bottom Copper w0.152: v1(15.5,9.2) 15.4,9.3 15.4,10.184 16.829,11.613 22.054,11.613 23.694,13.253 25.047,13.253 25.208,13.092 25.208,12.741 25.5,12.448 v1(25.5,12.3)
Accel_MISO: TP3.1 U2.6 U4.7 | length 28.8
  Top Copper w0.152: v1(14.101,8.6) 14.055,8.646 14.055,9.179 13.8,9.433 13.8,10.882 14.48,11.563 14.72,11.563 15.4,12.243 U2.6 ; U4.7 26.167,9.6 TP3.1
  Bottom Copper w0.152: v1(14.101,8.6) 14.101,9.317 13.847,9.571 13.847,11.308 14.789,12.25 21.85,12.25 23.436,13.836 27.707,13.836 28.426,13.117 28.426,11.86 TP3.1
Accel_SCL_SCLK: R7.1 TP1.1 U2.4 U2.28 U4.4 | length 50.4
  Top Copper w0.152: U2.4 14.6,12.23 14.511,12.14 14.177,12.14 13.295,11.258 13.295,7.805 13.64,7.46 16.058,7.46 16.071,7.447 20.217,7.447 20.23,7.46 24.375,7.46 24.951,8.036 24.951,8.326 U4.4 25.049,8.326 25.049,8.036 25.211,7.874 27.648,7.874 27.774,8 TP1.1 30.3,8.144 30.84,8.684 31.869,8.684 R7.1 ; v1(18.4,21.15) 18.845,20.705 19.095,20.705 19.435,20.365 U2.28
  Bottom Copper w0.152: v1(18.4,21.15) 19.103,21.853 21.247,21.853 23.1,20 24.363,20 29,15.475 29,11.429 29.2,11.229 29.2,9.1 TP1.1
Accel_SDA_MOSI: R8.1 TP2.1 U2.5 U2.27 U4.6 | length 49.4
  Top Copper w0.152: v1(14.9,8.013) 14.84,7.953 13.906,7.953 13.548,8.312 13.548,11.154 14.282,11.888 14.688,11.888 15,12.2 U2.5 ; U2.27 19.459,18.524 20.024,18.524 20.4,18.9 20.4,20.5 19.6,21.3 v1(19.5,21.3) ; U4.6 26.911,9.1 27.611,9.8 27.7,9.8 28.4,10.5 R8.1
  Bottom Copper w0.152: v1(14.9,8.013) 14.953,8.013 15.519,7.447 24.197,7.447 25.89,9.14 27.14,9.14 27.8,9.8 27.8,9.9 28.741,10.841 28.741,15.259 24.3,19.7 23.043,19.7 21.941,20.802 19.998,20.802 v1(19.5,21.3)
GND: "BLueTooth Board.8" "BLueTooth Board.9" C1.1 C2.2 C3.2 C4.1 C5.2 C6.1 C7.1 C8.1 C9.1 C10.1 C11.1 C12.1 C13.1 C14.1 C15.1 C16.1 C17.1 C18.2 C19.1 C22.2 C23.1 C24.1 J1.5 J1.S1 J1.S2 J1.S3 J1.S4 J1.S5 J1.S6 P1.4 P2.3 P2.5 P2.9 R6.2 R13.1 U1.1 U2.19 U2.57 U3.4 U4.5 U4.10 U4.12 U5.2 U6.2 U6.3 U6.5 U6.6 U7.B1 U7.C1 X1.2 X1.4 | length 64.5
  Top Copper w0.152: v1(3.859,20.559) 3.964,20.454 3.964,20.286 4.95,19.3 J1.S1 ; J1.S2 5.05,12.9 6.3,12.9 ; J1.5 6.211,14.7 6.3,14.611 6.3,12.9 ; v1(6.3,12) 6.3,12.5 ; C9.1 6.3,12.5 ; v1(8.3,18.7) 8.5,18.5 C5.2 C1.1 ; v1(12.4,7.8) 12.3,7.9 12.3,8.748 12.5,8.948 C14.1 ; v1(16,3.4) 17.933,3.4 19.034,2.3 20.815,2.3 ; v1(16.4,8.2) 16.4,8.348 16.7,8.648 C16.1 ; C13.1 17.11,22.8 18.752,22.8 18.947,22.605 19.395,22.605 v1(19.5,22.5) ; v1(17.9,11) 19.127,11 C18.2 20.763,10.827 C19.1 ; U1.1 18.655,25.1 19.5,24.255 v1(19.5,24.189) ; U2.19 21.59,15.3 21.99,14.9 v1(22.1,14.9) ; C7.1 20.515,1.605 20.515,1.999 20.815,2.3 ; C8.1 21.615,4.475 R6.2 20.815,2.3 ; v1(21.8,16.4) 22.25,16.85 23.5,16.85 X1.2 ; C2.2 C2.2@22.3,30.573 ; v1(23.119,20.815) 23.119,19.609 C10.1 C17.1 ; v1(23.5,27.6) 23.5,27.5 24.7,26.3 U5.2 ; U4.12 24.049,10.776 24.049,10.051 v1(24.5,9.6) 24.951,10.051 24.951,10.776 U4.10 ; v1(24,22.505) 24.029,22.476 24.579,22.476 24.655,22.4 U6.5 ; U4.5 27.145,8.375 27.265,8.495 27.695,8.495 v1(27.8,8.6) ; X1.4 26.324,15.574 27.074,15.574 v1(27.3,15.8) ; C23.1 30.49,30.19 v1(30.7,30.4) ; U3.4 31.805,5.724 32.581,6.5 v1(32.669,6.5) ; 6.3,12.5 6.3,12.9
  Top Copper w0.381: C9.1 C15.1 ; v1(11.1,22.7) 11.105,22.695 12.195,22.695 C11.1 C12.1 ; C3.2 C2.2 22.241,30.513 24.087,30.513 C22.2 24.106,30.521 25.894,30.521 R13.1 ; C6.1 C4.1 28.725,19.59 29.794,19.59 v1(29.819,19.615)
  other v2: 3,3 57,3
GPIO8/UART1_TX: "BLueTooth Board.13" U2.11 | length 45.2
  Top Copper w0.152: U2.11 17.4,12.3 18.105,11.595 22.913,11.595 24.171,12.853 27.078,12.853 27.725,13.5 28.225,13 30.189,13 30.489,13.3 v1(32.4,13.3)
  Bottom Copper w0.381: v1(32.4,13.3) 32.4,13.348 32.941,13.888 32.941,17.812 32.4,18.353 32.4,18.867 32.941,19.408 32.941,20.352 32.4,20.893 32.4,21.407 32.941,21.948 32.941,22.892 32.4,23.433 32.4,28 33.444,29.044 41.524,29.044 42.236,29.756 42.236,29.924 42.459,30.147 43.447,30.147 43.56,30.26
GPIO9/UART1_RX: "BLueTooth Board.14" U2.12 | length 35.2
  Top Copper w0.152: U2.12 17.8,12.3 18.252,11.848 22.808,11.848 24.125,13.164 27.033,13.164 27.621,13.752 29.452,13.752 30.774,15.074 30.774,15.664 30.936,15.826 32.094,15.826 36.531,20.263 36.531,25.771 41.02,30.26
GPIO10/UART1_CTS: "BLueTooth Board.3" U2.13 | length 31.3
  Top Copper w0.152: U2.13 18.224,12.841 18.224,12.345 18.469,12.1 22.704,12.1 24.02,13.417 26.928,13.417 28.911,15.4 v1(29.8,15.4)
  Bottom Copper w0.381: v1(29.8,15.4) 29.861,15.339 29.861,9.939 30.9,8.9 39.52,8.9 41.02,7.4
GPIO11/UART1_RTS: "BLueTooth Board.15" U2.14 | length 32.3
  Top Copper w0.152: U2.14 18.624,12.841 18.624,12.489 18.713,12.4 22.647,12.4 23.916,13.669 26.823,13.669 29.468,16.314 30.957,16.314 31.061,16.418 31.27,16.418 31.375,16.314 32.225,16.314 35.209,19.298 35.209,26.989 38.48,30.26
GPIO12: P1.2 U2.15 | length 14.4
  Top Copper w0.152: U2.15 19.755,13.7 19.779,13.676 19.779,13.621 20.253,13.147 23.037,13.147 23.811,13.921 26.719,13.921 30.05,17.252 30.138,17.34 P1.2
GPIO13/SCL: R4.1 U2.16 U7.B2
GPIO14/SDA: R15.1 U2.17 U7.A2 | length 22.9
  Top Copper w0.152: U2.17 20.2,14.5 v1(20.9,13.8)
  Bottom Copper w0.152: v1(3.5,21.7) 11.994,13.206 16.488,13.206 17.082,13.8 v1(20.9,13.8)
GPIO19/SMD: U2.30
GPIO27/ADC1: U2.39 | length 25.7
  Top Copper w0.152: U2.39 14.6,20.7 v1(15.4,21.5)
  Bottom Copper w0.152: v1(15.4,21.5) 15.295,21.605 15.068,21.605 14.674,21.999 14.674,23.756 22.044,31.126 32.5,31.126
GPIO28/ADC2: U2.40 | length 21.6
  Top Copper w0.152: U2.40 14.2,20.657 14.7,21.157 14.7,21.9 v1(15.4,22.6)
  Bottom Copper w0.152: v1(15.4,22.6) 15.525,22.6 15.871,22.947 18.864,22.947 18.976,23.059 25.351,23.059 26.896,21.514 28.714,21.514 31.6,24.4
GPIO29/ADC3: U2.41 | length 23.8
  Top Copper w0.152: U2.41 13.8,20.636 14.4,21.236 14.4,22.7 v1(15.4,23.7)
  Bottom Copper w0.152: v1(15.4,23.7) 20.026,28.326 30.853,28.326 32.163,29.636
HS_Interrupt: U2.29 U7.C2
Mic_Output: C20.2 R10.2 TP5.1 U2.38 U5.4 | length 23.5
  Top Copper w0.152: U2.38 15.024,19.759 15.024,20.511 15.113,20.6 15.7,20.6 16.2,21.1 16.2,23.3 16.4,23.5 v1(18.5,23.5) ; C20.2 22,27.2 23.058,26.142 ; R10.2 22.515,25.614 22.907,26.005 22.92,26.005 23.058,26.142 ; v1(24.1,24.2) v1@24.1,24.348 ; TP5.1 29.775,25.375 27.925,25.375 U5.4 27.45,25.35 26.748,24.648 24.4,24.648 v1@24.1,24.348 ; 23.058,26.142 24.1,25.1 v1@24.1,24.348
  Bottom Copper w0.152: v1(18.5,23.5) 23.4,23.5 v1(24.1,24.2)
"NetBLueTooth Board_2": "BLueTooth Board.2" R14.1 | length 3.5
  Top Copper w0.381: 38.48,7.4 38.598,7.282 38.598,4.118 R14.1
NetC6_2: C6.2 R2.1 X1.1 | length 4.7
  Top Copper w0.152: X1.1 25.9,16.75 26.424,17.274 26.424,18.024 26.72,18.32 27.02,18.32 27.3,18.6 C6.2 27.036,18.899 26.83,18.899 26.546,19.183 26.546,19.266 26.262,19.55 R2.1
NetC20_1: C20.1 R10.1 R11.2 U5.3 | length 10.5
  Top Copper w0.152: R11.2@22.515,23.814 22.251,24.078 22.251,24.42 21.085,25.586 R10.1 21.034,25.65 21.034,27.697 21.238,27.9 22.403,27.9 22.8,27.503 22.8,27.1 24.549,25.351 U5.3
NetC21_1: C21.1 U6.1 | length 3.2
  Top Copper w0.152: C21.1 22.58,22.047 23.676,22.047 23.771,21.952 24.923,21.952 U6.1@25.445,21.43
NetC21_2: C21.2 R11.1 | length 1.7
  Top Copper w0.152: C21.2 21.085,22.112 R11.1
NetC22_1: C22.1 R12.1 R13.2 U5.1 | length 5.4
  Top Copper w0.152: C22.1 24.112,29.085 R13.2 ; U5.1 25.9,27.451 R13.2 ; R12.1 R13.2
QSPI_CLK: U2.52 U3.6 | length 24.9
  Top Copper w0.152: U2.52 12.541,15.276 11.702,15.276 10.958,14.533 10.958,14.06 10.643,13.745 10.643,6.929 11.482,6.09 12.682,6.09 21.925,6.09 24.08,3.935 U3.6
QSPI_CS: R1.1 U2.56 U3.1 | length 36.9
  Top Copper w0.152: U2.56 12.552,13.687 12.013,13.687 11.652,13.326 11.652,7.348 11.793,7.207 15.953,7.207 15.966,7.194 21.87,7.194 21.883,7.207 33.133,7.207 33.223,7.118 33.223,4.42 33.352,4.291 33.352,2.525 ; U3.1 32.149,1.395 32.839,1.395 33.352,1.909 33.352,2.525 ; R1.1@34.464,2.525 33.352,2.525
QSPI_SD0: U2.53 U3.5 | length 23.8
  Top Copper w0.152: U2.53 12.541,14.876 11.659,14.876 11.21,14.428 11.21,13.955 10.895,13.64 10.895,7.034 11.586,6.343 12.786,6.343 23.976,6.343 24.595,5.724 U3.5
QSPI_SD1: U2.55 U3.2 | length 30.6
  Top Copper w0.152: U2.55 12.541,14.076 12.045,14.076 11.4,13.431 11.4,7.243 11.688,6.955 15.849,6.955 15.862,6.942 21.974,6.942 21.987,6.955 28.1,6.955 29.659,5.396 29.659,4.296 31.29,2.665 U3.2
QSPI_SD2: U2.54 U3.3 | length 35
  Top Copper w0.152: U2.54@12.357,14.5 11.913,14.5 11.463,14.05 11.463,13.851 11.148,13.536 11.148,7.139 11.691,6.595 12.891,6.595 25.105,6.595 29.739,1.961 33.011,1.961 33.1,2.051 33.1,3.155 32.32,3.935 U3.3
QSPI_SD3: U2.51 U3.7 | length 26.8
  Top Copper w0.152: U2.51 11.768,15.7 10.706,14.637 10.706,14.164 10.39,13.849 10.39,6.825 11.377,5.838 12.577,5.838 21.662,5.838 23.1,4.4 23.1,3.4 23.68,2.821 24.439,2.821 U3.7
RUN: P1.3 U2.26 | length 15.3
  Top Copper w0.152: U2.26 19.459,18.124 20.124,18.124 20.7,18.7 20.7,20.2 21.868,21.368 23.12,21.368 23.222,21.469 24.431,21.469 25.3,20.6 31.08,20.6 P1.3
RX: P2.7 U2.3 | length 29.3
  Top Copper w0.152: P2.7 5.014,27.784 8.662,27.784 8.853,27.593 8.853,21.453 7.7,20.3 v1(6.7,20.3) ; U2.3 14.224,12.889 14.224,13.624 14.542,13.942 16.142,13.942 v1(16.2,14)
  Bottom Copper w0.152: v1(6.7,20.3) 6.7,19.518 10.418,15.8 14.4,15.8 v1(16.2,14)
SW1: C8.2 R6.1 SW1.C SW1.D U2.18 | length 30.6
  Top Copper w0.152: SW1.D 12.299,4.376 12.497,4.376 12.513,4.36 14.79,4.36 15.104,4.675 SW1.C 20.385,4.675 C8.2 20.41,3.325 R6.1 ; U2.18 20.9,14.9 v1(22.1,13.7)
  Bottom Copper w0.152: v1(14.741,4.36) 14.741,4.994 13.548,6.188 13.548,11.365 14.716,12.533 20.933,12.533 v1(22.1,13.7)
SWCLK: P2.4 U2.24 | length 24.5
  Top Copper w0.152: U2.24 20.269,17.3 21.695,18.727 21.695,18.995 v1(21.8,19.1)
  Bottom Copper w0.152: P2.4 6.77,21.43 10.206,17.994 20.77,17.994 21.8,19.024 v1(21.8,19.1)
SWDIO: P2.2 U2.25 | length 22.7
  Top Copper w0.152: v1(7.8,21.4) 7.905,21.505 7.905,25.595 P2.2 ; U2.25 20.155,17.7 21,18.545 21,19.6 v1(21.5,20.1)
  Bottom Copper w0.152: v1@8.013,21.487 7.887,21.487 7.842,21.442 v1(7.8,21.4) 9.6,21.4 10.847,20.153 21.447,20.153 v1(21.5,20.1) ; P2.2 P2.2@8.177,25.73
TX: P2.8 U2.2 | length 18.4
  Top Copper w0.152: U2.2 13.8,14 v1(13.9,14.1)
  Bottom Copper w0.152: P2.8 4.23,21.631 12.102,13.759 12.956,13.759 13.297,14.1 v1(13.9,14.1)
USB_D_N: J1.2 R3.2 | length 3.1
  Top Copper w0.229: J1.2 5.261,16.564 5.971,16.564 6.02,16.516 7.059,16.516 7.277,16.733 7.631,16.733 7.985,17.086 R3.2
USB_D_P: J1.3 R5.2 | length 3.2
  Top Copper w0.229: J1.3 5.261,16.086 5.971,16.086 6.02,16.134 7.264,16.134 7.985,15.414 R5.2
USB_DX_N: R3.1 U2.46 | length 4.1
  Top Copper w0.152: 11.653,17.7 U2.46
  Top Copper w0.229: R3.1 9.768,16.747 9.768,16.575 9.903,16.441 10.394,16.441 11.653,17.7 11.677,17.723
USB_DX_P: R5.1 U2.47 | length 4
  Top Copper w0.152: 11.646,17.154 11.792,17.3 U2.47
  Top Copper w0.229: R5.1 9.768,15.753 9.768,15.925 9.903,16.059 10.552,16.059 11.646,17.154
VCC: "BLueTooth Board.7"
XIN: C4.2 U2.20 X1.3 | length 13.1
  Top Copper w0.152: U2.20 22.95,15.7 22.976,15.674 22.976,15.574 X1.3@23.5,15.05 ; X1.3 23.7,15.05 24.224,14.526 24.224,14.468 24.518,14.174 26.614,14.174 27.17,14.729 28.42,15.98 28.42,18.355 C4.2
XOUT: R2.2 U2.21 | length 7.4
  Top Copper w0.152: U2.21 20.485,16.1 22.011,17.626 24.414,17.626 24.441,17.6 24.661,17.6 25.501,18.44 25.501,18.451 25.601,18.451 R2.2
pads on no net: "BLueTooth Board.1" "BLueTooth Board.4" "BLueTooth Board.5" "BLueTooth Board.6" "BLueTooth Board.10" "BLueTooth Board.11" "BLueTooth Board.12" "BLueTooth Board.16" J1.4 P2.6 P2.10 U2.31 U2.32 U2.34 U2.35 U2.36 U2.37 U4.2 U4.3 U4.13 U4.15 U4.16

## Polygon pours and split planes (outlines as drawn)
3V3 on Signal Layer 2 "L2_3V3" (solid, pour order 1): 0,0 60,0 60,32 0,32
GND on Signal Layer 1 "L1_GND" (solid, pour order 2): 0,0 60,0 60,50 0,50
no net on Bottom Copper "NONET_L04_P003" (solid, pour order 3): 0,32 0,0 60,0 60,32
no net on Top Copper "NONET_L01_P004" (solid, pour order 4): 0.25,31.785 0.25,-0.215 60.25,-0.215 60.25,31.785

## Keep-outs
Keep-Out Layer:
  the board outline again, w0.5

## Silkscreen, mask and mechanical layers (free items; w line width, h text height)
Top Overlay:
  text "GND" at 34.349,37.264 h1.27
  text "RUN" at 34.475,34.514 h1.27
  text "GP29/ADC3" at 30.617,32.014 h1.27
  text "SWD port" at 0.826,32 h1.27
  text "GP28/ADC2" at 30.626,29.514 h1.27
  text "GP27/ADC1" at 30.775,27.014 h1.27
  text "GP12" at 33.968,24.264 h1.27
  text "GP11/RTS" at 31.383,22.014 h1.27
  text "GP10/ / CTS" at 31.3,18.75 h1.27
  text "GP9/ / RX" at 30.519,16 h1.27
  text "GP8/ / TX" at 33.434,13.5 h1.27
  text "UART1 pins:" at 34.025,12.955 h1.27 r90
  text "3V3" at 33.561,11.75 h1.27
  text "Bootsel" at 1.752,8 h1.27
  text "SW1" at 11.352,7.9 h1.27
Bottom Overlay:
  text "Rev. 1" at 50.715,25.5 h1.5

## Text inside footprints (layer, text, board x,y; h text height)
"BLueTooth Board": Top Overlay "GND" at 54.028,9.378 h0.8 r90; Top Overlay "GND" at 54.028,26.142 h0.8 r90
J1: Top 3D Body "PCB EDGE" at 1.611,8.38 h0.41 r90
P2: Top Overlay "1" at 9.8,26.53 h1.52